# Altium PCB PCB1.PcbDoc
Units mm, origin at the board's own origin, x right, y up, seen from the top; angles counter-clockwise.
Board outline 100.08 x 99.95 mm, 2 copper layers (Top Layer, Bottom Layer); 43 components, 102 nets, 275 pads, 0 vias.
Unrouted connection lines stored in the file: 2.
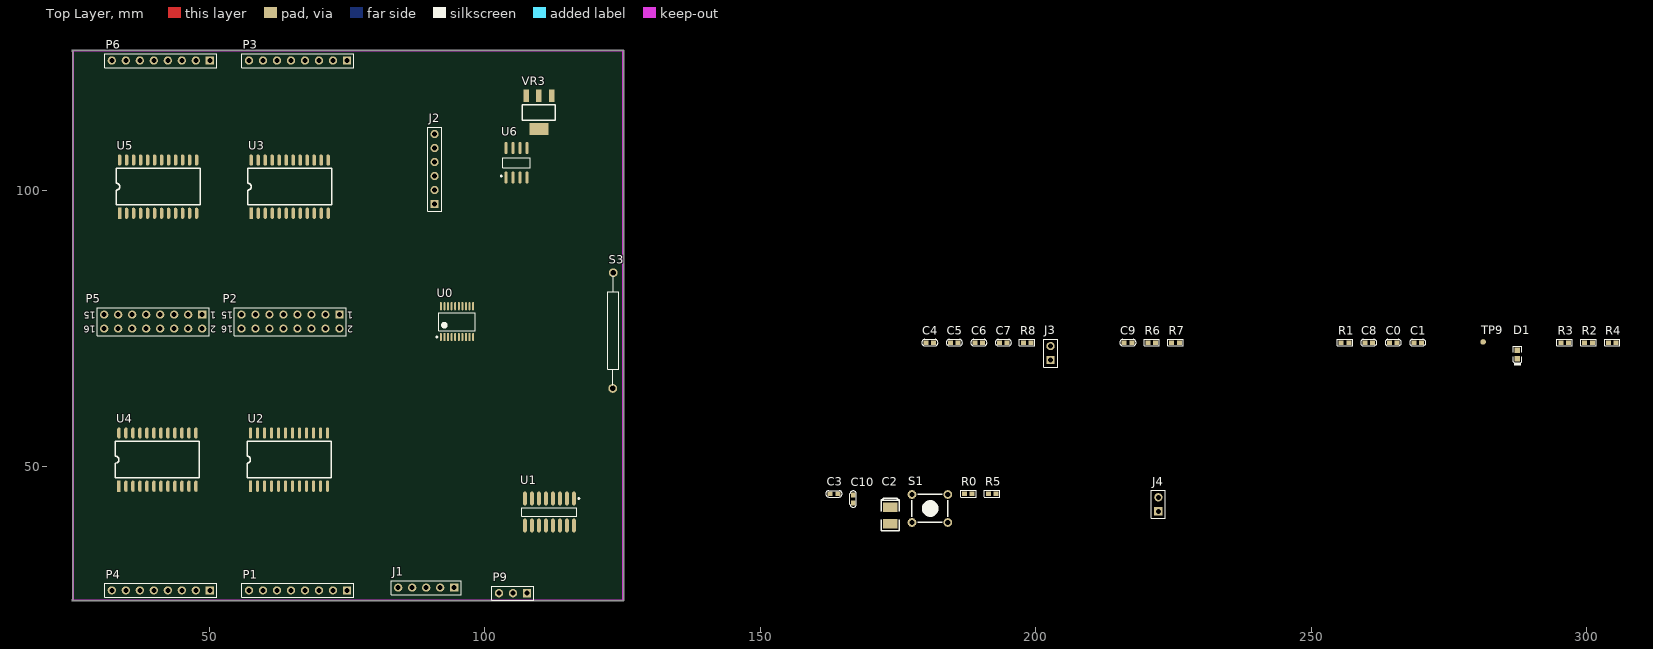
[diagram p0: Top Layer view]
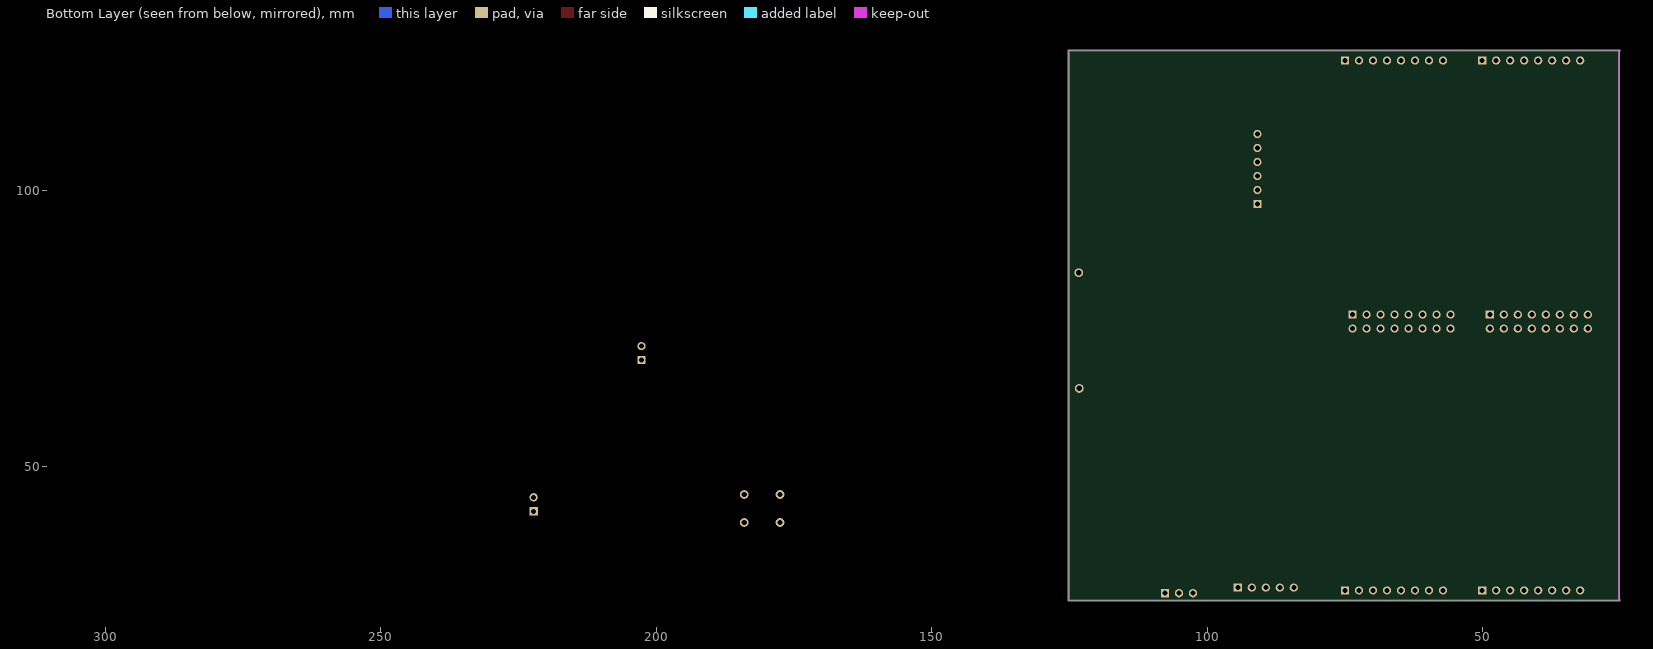
[diagram p1: Bottom Layer view, seen from below]

## Layer stack, top to bottom
Top Layer: signal copper 0.0356
Dielectric: dielectric 0.32, FR-4, Dk 4.8
Bottom Layer: signal copper 0.0356

## Board outline
25.273,25.527 cw(c25.273,25.654) 25.273,25.781 25.273,125.222 cw(c25.273,125.349) 25.273,125.476 124.968,125.476 cw(c124.968,125.349) 125.031,125.459 cw(c125.095,125.349) 125.222,125.349 125.222,25.654 cw(c125.095,25.654) 125.031,25.544 cw(c124.968,25.654) 124.968,25.527

## Design rules (kind name [scope] priority, off if disabled: settings)
Clearance [All] p1: gap=0.254
ComponentClearance [All] p1: gap=0.254 collisioncheckmode=3 verticalgap=0.254
PolygonConnect [All] p1: connectstyle=Relief reliefconductorwidth=0.254 reliefentries=4 polygonreliefangle="90 Angle"
RoutingVias [All] p1: holewidth=0.711 width=1.27 viastyle="Through Hole" minholewidth=0.711 minwidth=1.27 maxholewidth=0.711 maxwidth=1.27
SolderMaskExpansion [All] p1: expansion=0.102
TestPointUsage [All] p1: valid=0 allowmultiple=FALSE
Testpoint [All] p1: side=15 testpointundercomponent=TRUE minsize=1.016 maxsize=2.54 preferedsize=1.524 minholesize=0 maxholesize=1.016 preferedholesize=0.813 testpointgrid=0.025 style=1023 order=0123456789
Width [All] p1: maxlimit=0.254 minlimit=0.254 preferedwidth=0.254
18 further rules are at their usual default settings.

## Classes and differential pairs
component class float: C0 C1 C2 C3 C4 C5 C6 C7 C8 C9 C10 D1 J1 J2 J3 J4 P9 R0 R1 R2 R3 R4 R5 R6 R7 R8 S1 S3 TP9 U0 U1 U2 U3 U4 U5 U6 VR3
component class connect: P1 P2 P3 P4 P5 P6

## Components (designator, comment, footprint, x,y, rotation, side; value= is the part's Value field where it differs from the comment)
C0 "0.1uF" 0603C 264.16,72.39 r0 top
C1 "10uF" 0603C 268.605,72.39 r0 top
C2 "10u" LC-CASE-B_3528 173.609,41.021 r90 top
C3 "0.1uF" 0603C 162.687,44.958 r0 top
C4 "0.1uF" 0603C 180.086,72.39 r0 top
C5 "10uF" 0603C 184.531,72.39 r0 top
C6 "0.1uF" 0603C 188.976,72.39 r0 top
C7 "10uF" 0603C 193.421,72.39 r0 top
C8 "10uF" 0603C 259.715,72.39 r0 top
C9 "10uF" 0603C 216.027,72.39 r0 top
C10 "10uF" 0603C 166.878,43.307 r90 top
D1 "LED" LC-0603_LED_S1 287.401,70.231 r90 top
J1 "CON5" HDR1X5 94.488,27.94 r180 top
J2 "MHDR1X6" HDR1X6 90.932,97.536 r90 top
J3 "CON2" HDR1X2 202.692,69.215 r90 top
J4 "CON3" HDR1X2 222.25,41.783 r90 top
P1 "MHDR1X8" HDR1X8 75.033,27.432 r180 top
P2 "MHDR2X8" HDR2X8 73.66,77.47 r180 top
P3 "MHDR1X8" HDR1X8 75.033,123.571 r180 top
P4 "MHDR1X8" HDR1X8 50.141,27.432 r180 top
P5 "MHDR2X8" HDR2X8 48.768,77.47 r180 top
P6 "MHDR1X8" HDR1X8 50.141,123.571 r180 top
P9 "MHDR1X3" HDR1X3 107.696,26.924 r180 top
R0 "RES" 0603R 187.071,44.958 r0 top
R1 "Res1" 0603R 255.397,72.39 r0 top
R2 "Res1" 0603R 299.593,72.39 r0 top
R3 "Res" 0603R 295.275,72.39 r0 top
R4 "RES" 0603R 303.911,72.39 r0 top
R5 "RES" 0603R 191.389,44.958 r0 top
R6 "RES" 0603R 220.345,72.39 r0 top
R7 "RES" 0603R 224.663,72.39 r0 top
R8 "RES" 0603R 197.739,72.39 r0 top
S1 "Switch" KEY_M 177.546,44.831 r0 top
S3 "SW-PB" reed_switch 123.444,74.676 r90 top
TP9 "TP" TP1 281.178,72.517 r90 top
U0 "STM32F030F4P6" STM-TSSOP20_L 94.996,76.2 r90 top
U1 "ULN2003L" NSO16_M 111.76,41.656 r270 top
U2 "MAX7219CWG" SO-24W 57.531,46.355 r90 top
U3 "MAX7219CWG" SO-24W 57.658,95.885 r90 top locked
U4 "MAX7219CWG" SO-24W 33.655,46.355 r90 top
U5 "MAX7219CWG" SO-24W 33.782,95.885 r90 top
U6 "MAX485" NSO8_N 105.791,105.029 r90 top
VR3 "AP1117E33L" LC-SOT-223 109.855,114.173 r90 top

## Footprints (in the part's own frame and the unit in brackets; to place one, negate y for a bottom-side part, rotate by r counter-clockwise, add the part's x,y. Pads: shape width x height; smd on the part's side, far side on the other; paste and mask are expansions set on the pad)
0603C [mm]
  rect 0.9x0.8 smd: 1(0,0) 2(1.4,0)
  silkscreen extent -0.79,-0.59 2.19,0.59, body extent -0.6,-0.54 2,0.46, height 0.89
0603R [mm]
  rect 0.9x0.8 smd: 1(0,0) 2(1.4,0)
  silkscreen extent -0.7,-0.6 2.09,0.6, body extent -0.06,-0.4 1.54,0.4, height 0.45
HDR1X2 [mm] "Connector; Header; 2 Position"
  rect 1.5x1.5 hole 0.9: 1(0,0)
  round 1.5 hole 0.9: 2(2.54,0)
  silkscreen extent -1.27,-1.27 3.81,1.27
HDR1X3 [mm] "Connector; Header; 3 Position"
  rect 1.5x1.5 hole 0.9: 1(0,0)
  round 1.5 hole 0.9: 2(2.54,0) 3(5.08,0)
  silkscreen extent -1.27,-1.27 6.35,1.27
HDR1X5 [mm] "Connector; Header; 5 Position"
  rect 1.5x1.5 hole 0.9: 1(0,0)
  round 1.5 hole 0.9: 2(2.54,0) 3(5.08,0) 4(7.62,0) 5(10.16,0)
  silkscreen extent -1.27,-1.27 11.43,1.27
HDR1X6 [mm] "Connector; Header; 6 Position"
  rect 1.5x1.5 hole 0.9: 1(0,0)
  round 1.5 hole 0.9: 2(2.54,0) 3(5.08,0) 4(7.62,0) 5(10.16,0) 6(12.7,0)
  silkscreen extent -1.27,-1.27 13.97,1.27
HDR1X8 [mm] "Connector; Header; 8 Position"
  rect 1.5x1.5 hole 0.9: 1(0,0)
  round 1.5 hole 0.9: 2(2.54,0) 3(5.08,0) 4(7.62,0) 5(10.16,0) 6(12.7,0) 7(15.24,0) 8(17.78,0)
  silkscreen extent -1.27,-1.27 19.05,1.27
HDR2X8 [mm] "Connector; Header; 8x2 Position"
  rect 1.5x1.5 hole 0.9: 1(0,0)
  round 1.5 hole 0.9: 2(0,2.54) 3(2.54,0) 4(2.54,2.54) 5(5.08,0) 6(5.08,2.54) 7(7.62,0) 8(7.62,2.54) 9(10.16,0) 10(10.16,2.54) 11(12.7,0) 12(12.7,2.54) 13(15.24,0) 14(15.24,2.54) 15(17.78,0) 16(17.78,2.54)
  silkscreen extent -1.27,-1.27 19.05,3.81
KEY_M [mil]
  round 62 hole 38: 1(0,0) 1(255.91,0) 2(0,-200) 2(255.91,-200)
  silkscreen extent 0,-200 255,0
LC-0603_LED_S1 [mm]
  rect 0.93x0.98 smd: A(0.77,0) K(-0.77,0)
  silkscreen extent -1.98,-0.79 1.54,0.79, body extent -0.8,-0.4 0.8,0.4, height 0.6
LC-CASE-B_3528 [mm]
  rect 1.8x2.6 smd: 1(1.5,0) 2(-1.5,0)
  silkscreen extent -2.73,-1.65 3.16,1.65, body extent -1.85,-1.47 1.85,1.46, height 2.03
LC-SOT-223 [mm]
  rect 2.2x1 smd: 1(3,-2.3) 2(3,0) 3(3,2.3)
  rect 2.2x3.5 smd: 2(-3,0)
  silkscreen extent -1.4,-3 1.4,3, body extent -3.49,-3.24 3.49,3.24, height 1.64
NSO8_N [mm] "SOIC-max660"
  oval 2.2x0.6 smd: 1(-2.654,1.905) 2(-2.654,0.635) 3(-2.654,-0.635) 4(-2.654,-1.905) 5(2.654,-1.905) 6(2.654,-0.635) 7(2.654,0.635) 8(2.654,1.905)
  silkscreen extent -2.52,-2.5 0.9,2.88, body extent -1.95,-2.45 1.95,2.45, height 1.75
NSO16_M [mm] "SOIC, 16-Leads, Body 9.9x3.9mm, Pitch 1.27mm, IPC Low Density"
  oval 2.5x0.7 smd: 1(-2.45,4.445) 2(-2.45,3.175) 3(-2.45,1.905) 4(-2.45,0.635) 5(-2.45,-0.635) 6(-2.45,-1.905) 7(-2.45,-3.175) 8(-2.45,-4.445) 9(2.45,-4.445) 10(2.45,-3.175) 11(2.45,-1.905) 12(2.45,-0.635) 13(2.45,0.635) 14(2.45,1.905) 15(2.45,3.175) 16(2.45,4.445)
  silkscreen extent -2.57,-5 0.8,5.47, body extent -2,-5 2,5, height 1.75
reed_switch [mm]
  round 1.6 hole 1: 1(-10.6,0.2) 2(10.4,0.1)
  silkscreen extent -10,-0.9 9.8,1.1
SO-24W [mil]
  rect 80x24 smd: 1(-1,0)
  oval 80x24 smd: 2(-1,-50) 3(-1,-100) 4(-1,-150) 5(-1,-200) 6(-1,-250) 7(-1,-300) 8(-1,-350) 9(-1,-400) 10(-1,-450) 11(-1,-500) 12(-1,-550) 13(379,-550) 14(379,-500) 15(379,-450) 16(379,-400) 17(379,-350) 18(379,-300) 19(379,-250) 20(379,-200) 21(379,-150) 22(379,-100) 23(379,-50) 24(379,0)
  silkscreen extent 59,-575 319,25
STM-TSSOP20_L [mm] "SOP, 20-Leads, Body 6.6x4.5mm, Pitch 0.65mm, IPC High Density"
  oval 1.5x0.35 smd: 1(-2.8,2.925) 2(-2.8,2.275) 3(-2.8,1.625) 4(-2.8,0.975) 5(-2.8,0.325) 6(-2.8,-0.325) 7(-2.8,-0.975) 8(-2.8,-1.625) 9(-2.8,-2.275) 10(-2.8,-2.925) 11(2.8,-2.925) 12(2.8,-2.275) 13(2.8,-1.625) 14(2.8,-0.975) 15(2.8,-0.325) 16(2.8,0.325) 17(2.8,0.975) 18(2.8,1.625) 19(2.8,2.275) 20(2.8,2.925)
  silkscreen extent -2.92,-3.3 1.65,3.77, body extent -2.25,-3.3 2.25,3.3, height 1.2
TP1 [mm]
  round 1 smd: 1(-0.008,0.012)

## Part data
C0 C1 C3 C4 C5 C6 C7 C8 C9 C10: library part CAP, "Capacitor"
C2: library part ELECTRO2
J1 J3: "Connector"
J2: "Header, 6-Pin"
J4: library part CON2, "Connector"
P1 P3 P4 P6: "Header, 8-Pin"
P2 P5: "Header, 8-Pin, Dual row"
P9: "Header, 3-Pin"
R0 R3 R4 R5 R6 R7 R8: library part Res2, "Resistor"
R1 R2: "贴片电阻"
S1: library part SW-PB
S3: "Switch"
U0: "ARM Cortex-M0 32-bit MCU, 16 KB Flash, 4 KB Internal RAM, 15 I/Os, 20-pin TSSOP, -40 to 85 degC, Tube"
U1: "驱动芯片"
U2 U3 U4 U5: "CI-MAX7219CWG"
U6: library part SP3485, "485总线芯片"
VR3: library part "Volt Reg", "Voltage Regulator"

## Nets (pads, with @x,y where several pads share a name; then routed paths per layer and width w, separated by ;. In a path a pad name is that pad's centre, name@x,y a point inside that pad or via, vN(x,y) a via of type N, cw(c..) or ccw(c..) an arc to the next point about the centre after c; other vN are vias at no path point)
3V3: C2.1 C9.1 R0.1 R2.1 R3.1 U0.5 U0.16 U6.8 VR3.2
5V: C0.2 C1.2 C3.2 C4.2 C5.2 C6.2 C7.2 C8.2 C10.2 J1.5 J4.1 R4.1 R5.1 R6.1 R7.1 U1.9 U2.19 U3.19 U4.19 U5.19 VR3.3
485A: J3.2 R8.1 U6.6
485B: J3.1 R8.2 U6.7
DE: U0.3 U6.3
DIG_0_0: P1.1 U2.2
DIG_0_1: P1.2 U2.11
DIG_0_2: P1.3 U2.6
DIG_0_3: P1.4 U2.7
DIG_0_4: P1.5 U2.3
DIG_0_5: P1.6 U2.10
DIG_0_6: P1.7 U2.5
DIG_0_7: P1.8 U2.8
DIG_1_0: P2.2 U3.2
DIG_1_1: P2.4 U3.11
DIG_1_2: P2.6 U3.6
DIG_1_3: P2.8 U3.7
DIG_1_4: P2.10 U3.3
DIG_1_5: P2.12 U3.10
DIG_1_6: P2.14 U3.5
DIG_1_7: P2.16 U3.8
DIG_2_0: P4.1 U4.2
DIG_2_1: P4.2 U4.11
DIG_2_2: P4.3 U4.6
DIG_2_3: P4.4 U4.7
DIG_2_4: P4.5 U4.3
DIG_2_5: P4.6 U4.10
DIG_2_6: P4.7 U4.5
DIG_2_7: P4.8 U4.8
DIG_3_0: P5.2 U5.2
DIG_3_1: P5.4 U5.11
DIG_3_2: P5.6 U5.6
DIG_3_3: P5.8 U5.7
DIG_3_4: P5.10 U5.3
DIG_3_5: P5.12 U5.10
DIG_3_6: P5.14 U5.5
DIG_3_7: P5.16 U5.8
DOOR: R3.2 S3.1 TP9.1 U0.12
GND: C0.1 C1.1 C2.2 C3.1 C4.1 C5.1 C6.1 C7.1 C8.1 C9.2 C10.1 J2.3 J2.4 J4.2 S1.1 S3.2 U0.1 U0.15 U1.8 U2.4 U2.9 U3.4 U3.9 U4.4 U4.9 U5.4 U5.9 U6.5 VR3.1
IN5: P9.1 U1.5
IN6: P9.2 U1.6
IN7: P9.3 U1.7
MOSI: U0.13 U2.1
MOSI_0: U2.24 U3.1
MOSI_1: U3.24 U4.1
MOSI_2: U4.24 U5.1
MOSI_3: U5.24
NetD1_A: D1.A R2.2
NetD1_K: D1.K R1.1
NetR4_2: R4.2 U3.18
NetR5_2: R5.2 U2.18
NetR6_2: R6.2 U4.18
NetR7_2: R7.2 U5.18
NRST: R0.2 S1.2 U0.4
NSS: U0.10 U2.12 U3.12 U4.12 U5.12
OUT1: J1.1 U1.16
OUT2: J1.2 U1.15
OUT3: J1.3 U1.14
OUT4: J1.4 U1.13
PA0: U0.6 U1.1
PA1: U0.7 U1.2
PA2: U0.8 U1.3
PA3: U0.9 U1.4
PB1: R1.2 U0.14
RE: U0.2 U6.2
SCLK: U0.11 U2.13 U3.13 U4.13 U5.13
SEGA_0: P2.1 U2.14
SEGA_1: P3.1 U3.14
SEGA_2: P5.1 U4.14
SEGA_3: P6.1 U5.14
SEGB_0: P2.3 U2.16
SEGB_1: P3.2 U3.16
SEGB_2: P5.3 U4.16
SEGB_3: P6.2 U5.16
SEGC_0: P2.5 U2.20
SEGC_1: P3.3 U3.20
SEGC_2: P5.5 U4.20
SEGC_3: P6.3 U5.20
SEGD_0: P2.7 U2.23
SEGD_1: P3.4 U3.23
SEGD_2: P5.7 U4.23
SEGD_3: P6.4 U5.23
SEGDP_0: P2.15 U2.22
SEGDP_1: P3.8 U3.22
SEGDP_2: P5.15 U4.22
SEGDP_3: P6.8 U5.22
SEGE_0: P2.9 U2.21
SEGE_1: P3.5 U3.21
SEGE_2: P5.9 U4.21
SEGE_3: P6.5 U5.21
SEGF_0: P2.11 U2.15
SEGF_1: P3.6 U3.15
SEGF_2: P5.11 U4.15
SEGF_3: P6.6 U5.15
SEGG_0: P2.13 U2.17
SEGG_1: P3.7 U3.17
SEGG_2: P5.13 U4.17
SEGG_3: P6.7 U5.17
SWCLK: J2.5 U0.20
SWDIO: J2.6 U0.19
USART_RX: J2.2 U0.18 U6.1
USART_TX: J2.1 U0.17 U6.4
pads on no net: U1.10 U1.11 U1.12

## Keep-outs
Keep-Out Layer:
  lines w0.254: 25.273,25.654 124.968,25.654 ; 25.273,125.349 124.968,125.349 ; 25.4,25.654 25.4,125.349 ; 125.095,25.654 125.095,125.349

## Text inside footprints (layer, text, board x,y; h text height)
P2: Top Overlay "2" at 76.2,75.438 h1.27 r180; Top Overlay "1" at 76.2,77.978 h1.27 r180; Top Overlay "15" at 54.356,77.978 h1.27 r180; Top Overlay "16" at 54.356,75.438 h1.27 r180
P5: Top Overlay "2" at 51.308,75.438 h1.27 r180; Top Overlay "1" at 51.308,77.978 h1.27 r180; Top Overlay "15" at 29.464,77.978 h1.27 r180; Top Overlay "16" at 29.464,75.438 h1.27 r180